# EAGLE board Down Linker IMver (EAGLE 9.6.2)
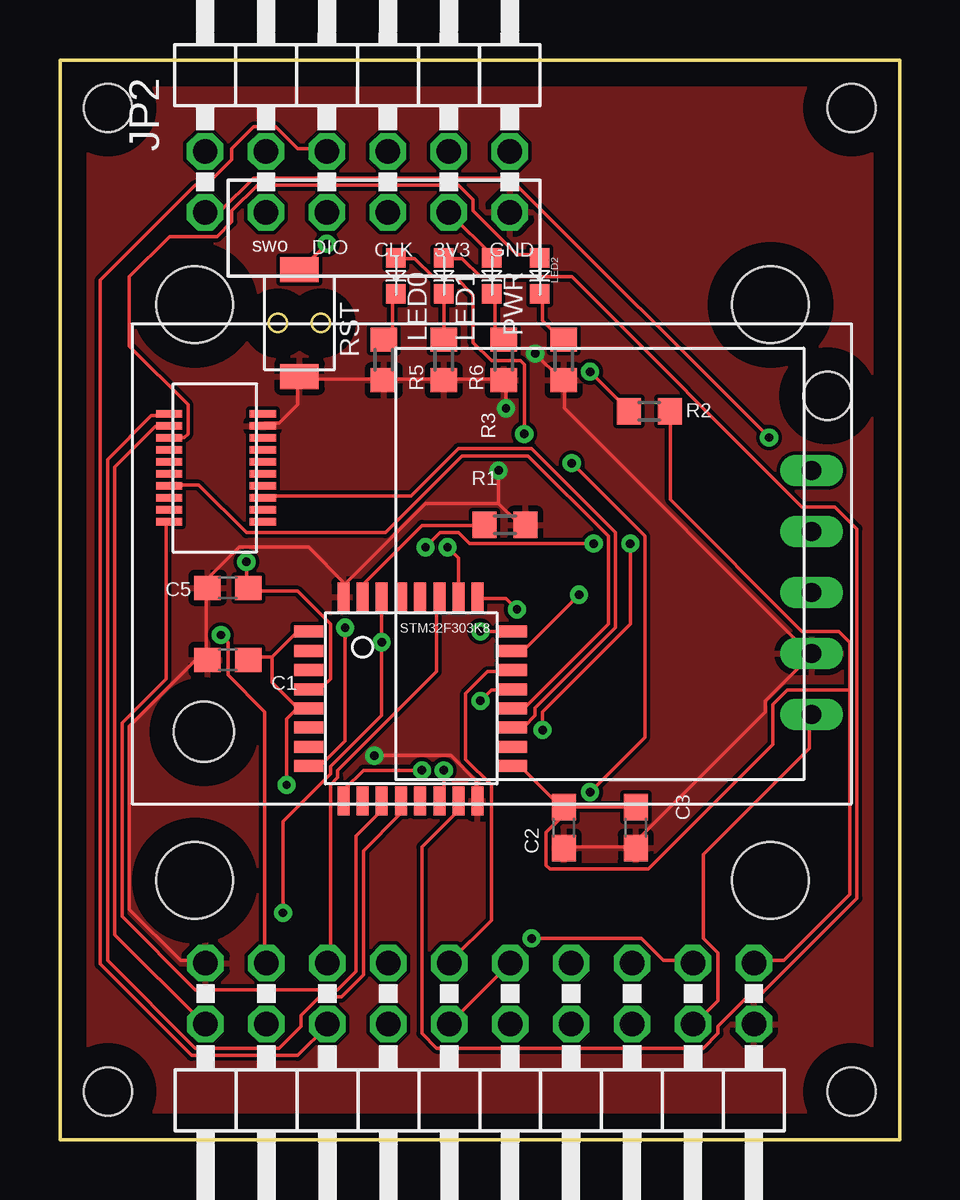
[diagram p0: board, top side]
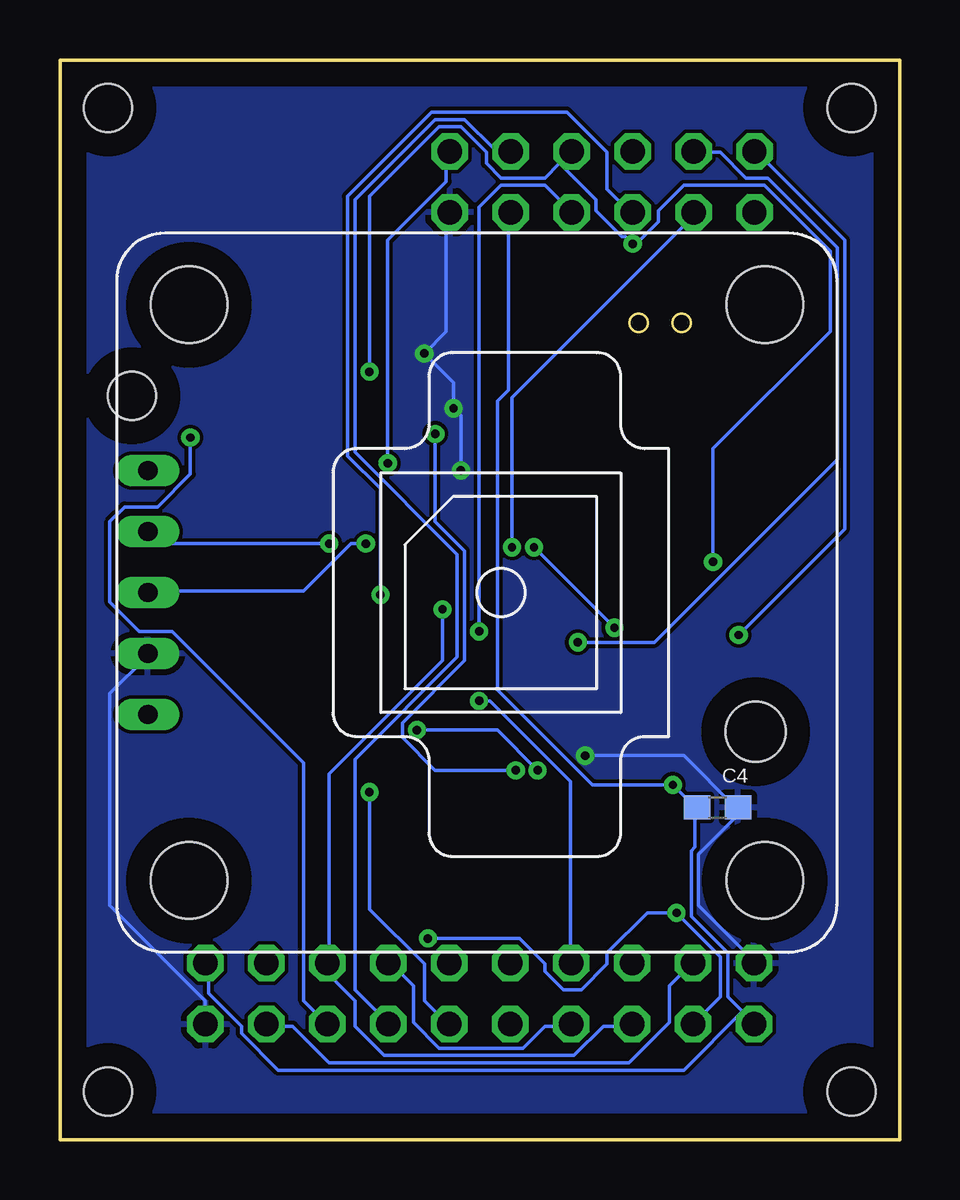
[diagram p1: board, bottom side, seen from below]

Size 35 x 45 mm. Coordinates in mm from the lower left corner, seen from the top.
Outline: 0,0 0,45 35,45 35,0 0,0
Copper layers (1*16): Top 0.035mm / dielectric 1.5mm / Bottom 0.035mm
Design rules "default": minimum track width 6mil, minimum drill 0.35mm, track to track 6mil, track to pad 6mil, pad to pad 6mil, via to via 6mil, smd to smd 6mil, copper to edge 40mil, drill to drill 6mil, minimum pad ring 10mil, minimum via ring 8mil, stop-mask expansion 4mil, vias tented up to drill 0mil, thermal gap 10mil
Holes 2 mm at 2,43 2,2 33,2 33,43

## Footprints (pad centres in the part's own frame; a part is rotated, then mirrored left to right if it is on the bottom)
C1608 = smd 1.1 x 1: 1 -0.85,0; 2 0.85,0
IM920C = smd 0.3 x 1.1: $P1 -1.75,-13.45; $P2 -1.75,-9.55; $P3 -2.25,-13.45; $P4 -2.25,-9.55; $P5 -2.75,-13.45; $P6 -2.75,-9.55; $P7 -3.25,-13.45; $P8 -3.25,-9.55; $P9 -3.75,-13.45; $P10 -3.75,-9.55; $P11 -4.25,-13.45; $P12 -4.25,-9.55; $P13 -4.75,-13.45; $P14 -4.75,-9.55; $P15 -5.25,-13.45; $P16 -5.25,-9.55; $P17 -5.75,-13.45; $P18 -5.75,-9.55; $P19 -6.25,-13.45; $P20 -6.25,-9.55 | hole 2.5: 7,-12 | hole 2: -7,14
2X06/90 = drill 1.016 octagon: 1 -6.35,-6.35; 2 -6.35,-3.81; 3 -3.81,-6.35; 4 -3.81,-3.81; 5 -1.27,-6.35; 6 -1.27,-3.81; 7 1.27,-6.35; 8 1.27,-3.81; 9 3.81,-6.35; 10 3.81,-3.81; 11 6.35,-6.35; 12 6.35,-3.81
2X10/90 = drill 1.016 octagon: 1 -11.43,-6.35; 2 -11.43,-3.81; 3 -8.89,-6.35; 4 -8.89,-3.81; 5 -6.35,-6.35; 6 -6.35,-3.81; 7 -3.81,-6.35; 8 -3.81,-3.81; 9 -1.27,-6.35; 10 -1.27,-3.81; 11 1.27,-6.35; 12 1.27,-3.81; 13 3.81,-6.35; 14 3.81,-3.81; 15 6.35,-6.35; 16 6.35,-3.81; 17 8.89,-6.35; 18 8.89,-3.81; 19 11.43,-6.35; 20 11.43,-3.81
OSXX1608C1A = smd 0.8 x 0.8: AN -0.75,0; CT 0.75,0
R0603 = smd 1 x 1.1: 1 -0.85,0; 2 0.85,0
TVAF06-A020B-R = smd 1.6 x 1.05: P$1 0,2.225; P$2 0,-2.225
STM32F303K8 = smd 0.5 x 1.2: BOOT 1.6,8.5; PA3/UART2_RX 0.8,0; PA4/SPI1_NSS 1.6,0; PA5/SPI1_SCK 2.4,0; PA6/SPI1_MISO 3.2,0; PA7/SPI1_MOSI 4,0; PA15/I2C1_SCL 6.4,8.5; PB0 4.8,0; PB1 5.6,0; PB3/SWO 5.6,8.5; PB4 4.8,8.5; PB5 4,8.5; PB6 3.2,8.5; PB7/I2C1_SDA 2.4,8.5; VSS 0.8,8.5; VSS2 6.4,0 | smd 1.2 x 0.5: NRST -0.65,4.65; PA0 -0.65,3.05; PA1 -0.65,2.25; PA2/UART2_TX -0.65,1.45; PA8 7.85,2.25; PA9/UART1_TX 7.85,3.05; PA10/UART1_RX 7.85,3.85; PA11/CAN_RX 7.85,4.65; PA12/CAN_TX 7.85,5.45; PA13/SWDIO 7.85,6.25; PA14/SWCLK 7.85,7.05; PF0 -0.65,6.25; PF1 -0.65,5.45; VDD -0.65,7.05; VDD2 7.85,1.45; VDDA -0.65,3.85
AE-GYSFDMAXB = drill 0.8 long: P1 13.716,5.08; P2 13.716,2.54; P3 13.716,0; P4 13.716,-2.54; P5 13.716,-5.08 | hole 3.2: -12,12; 12,12; 12,-12; -12,-12

## Placement (x,y rotation side)
C1  100nF  [C1608]  7,20 180 top
C2  100nF  [C1608]  21,13 270 top
C3  4.7uF  [C1608]  24,13 270 top
C4  10nF  [C1608]  7.59,13.83 0 bottom
C5  0.1uF  [C1608]  7,23 180 top
IM  IM920C  [IM920C]  18,24 270 top
JP2  [2X06/90]  12.4,45 0 top
JP3  [2X10/90]  17.5,1 180 top
LED0  [OSXX1608C1A]  14,36 270 top
LED1  [OSXX1608C1A]  16,36 270 top
LED2  [OSXX1608C1A]  20,36 270 top
PWR  [OSXX1608C1A]  18,36 270 top
R1  10k  [R0603]  18.56,25.62 0 top
R2  10k or DNF  [R0603]  24.57,30.36 0 top
R3  100  [R0603]  18.5,32.5 90 top
R4  100  [R0603]  21,32.5 90 top
R5  100  [R0603]  13.5,32.5 90 top
R6  100  [R0603]  16,32.5 90 top
RST  [TVAF06-A020B-R]  9.98,34.03 0 top
U$1  STM32F303K8  [STM32F303K8]  11.02,14.12 0 top
U$2  AE-GYSFDMAXB  [AE-GYSFDMAXB]  17.62,22.8 180 bottom

## Library data of the parts
C1-C5 = rcl; SPICEPREFIX: C
IM = IM920
JP2 JP3 = pinhead
LED0 LED1 LED2 PWR = Chip LED
R1-R6 = rcl; SPICEPREFIX: R
RST = Tact switch
U$1 = STM32F303K8
U$2 = AE-GYSFDMAXB

## Nets
+3V3: C1.1 C2.1 C3.1 C4.1 IM.$P17 JP2.9 JP3.1 JP3.20 PWR.AN R2.2 U$1.VDD U$1.VDD2 U$1.VDDA
+5V: JP2.2 JP3.4 JP3.17 U$2.P1
BIT1: JP3.11 U$1.PA12/CAN_TX
BIT2: JP3.13 U$1.PA11/CAN_RX
BOOT0: R1.1 U$1.BOOT
FP_CHECKER: JP3.15 U$1.PB4
FPRAW: JP2.12 JP3.10
GND: C1.2 C2.2 C3.2 C4.2 C5.2 IM.$P18 JP2.11 JP3.2 JP3.19 R1.2 R3.1 R4.1 R5.1 R6.1 RST.P$2 U$1.VSS U$1.VSS2 U$2.P2
GPSRX: U$1.PA2/UART2_TX U$2.P3
GPSTX: U$1.PA3/UART2_RX U$2.P4
IM_BUSY: IM.$P1 U$1.PA5/SPI1_SCK
IM_RESET: IM.$P19 U$1.PA6/SPI1_MISO
IM_RX: IM.$P6 U$1.PA9/UART1_TX
IM_TX: IM.$P7 U$1.PA10/UART1_RX
LED: IM.$P15 LED2.AN
LED0: LED0.AN U$1.PB0
LED1: LED1.AN U$1.PB1
LOGRX: JP3.7 JP3.14
LOGTX: JP3.9 JP3.12
N$1: PWR.CT R3.2
N$2: LED0.CT R5.2
N$3: LED2.CT R4.2
N$4: LED1.CT R6.2
NRST: C5.1 JP2.8 R2.1 RST.P$1 U$1.NRST
OSC_IN: U$1.PF0
OSC_OUT: U$1.PF1
PWM: JP2.1 JP3.6
SCL: JP2.6 JP3.5 JP3.16 U$1.PA15/I2C1_SCL
SDA: JP2.4 JP3.3 JP3.18 U$1.PB7/I2C1_SDA
SW: JP2.10 JP3.8
SWCLK: JP2.7 U$1.PA14/SWCLK
SWDIO: JP2.5 U$1.PA13/SWDIO
SWO: JP2.3 U$1.PB3/SWO

## Tracks (layer width: path | path; a pad name or v marks a point on that pad's centre or on a via)
+3V3  (via drill 0.35)
  Top 0.152: C2.1 21.03,13.87 23.93,13.87 C3.1 | U$1.VDD2 18.9,15.54 19.2,15.54 20.88,13.87 C2.1 | 32.92,18.75 32.92,10.21 30.18,7.47 28.96,7.47 JP3.1 | 32.92,18.75 32.92,20.73 32.46,21.18 30.94,21.18 25.45,26.67 25.45,30.33 R2.2 | 32.92,18.75 30.33,18.75 29.72,18.14 29.72,16.46 24.54,11.28 20.42,11.28 20.27,11.43 20.27,12.8 20.88,13.41 20.88,13.72 C2.1 | PWR.AN 17.98,36.88 16.31,38.56 JP2.9 | 8.84,20.12 7.92,20.12 C1.1 | 8.84,20.12 9.75,21.03 10.36,21.03 U$1.VDD | 9.91,17.98 10.36,17.98 U$1.VDDA 9.91,17.98 | 9.91,17.98 8.84,19.05 8.84,20.12 | IM.$P17 4.42,29.72 3.96,29.72 2.29,28.04 2.29,8.53 5.94,4.88 JP3.20 | 9.91,17.98 9.45,17.53 v9.45,14.78
  Bottom 0.152: 6.55,5.33 6.1,4.88 JP3.20 6.55,5.33 | 6.55,5.33 7.16,5.94 7.16,7.77 8.69,9.3 8.69,12.04 8.53,12.19 8.53,13.72 C4.1 8.53,13.87 v9.45,14.78 12.8,14.78 16.76,18.75 16.76,30.79 16.31,31.24 16.31,38.56 JP2.9 | 6.55,5.33 8.99,2.9 25.91,2.9 27.43,4.42 27.43,4.72 28.8,6.1 28.8,7.32 JP3.1
+5V  (via drill 0.35)
  Top 0.152: U$2.P1 31.24,17.68 31.24,16.31 26.82,11.89 26.82,8.38 27.43,7.77 27.43,5.79 26.52,4.88 JP3.4 | v6.71,21.03 7.01,20.73 7.01,19.36 8.53,17.83 8.53,7.47 JP3.17
  Bottom 0.152: v6.71,21.03 2.29,25.45 2.29,37.49 5.94,41.15 JP2.2 | JP3.4 26.36,4.72 25.3,4.72 23.77,3.2 11.28,3.2 9.6,4.88 9.6,6.4 8.69,7.32 JP3.17
BIT1
  Top 0.152: U$1.PA12/CAN_TX 18.75,19.51 17.83,19.51 16.92,18.59 16.92,15.85 17.98,14.78 17.98,9.14 16.31,7.47 JP3.11
BIT2  (via drill 0.35)
  Top 0.152: v17.53,18.29 17.98,18.75 18.75,18.75 U$1.PA11/CAN_RX
  Bottom 0.152: v17.53,18.29 17.07,18.29 13.72,14.94 13.72,7.47 JP3.13
BOOT0
  Top 0.152: R1.1 17.68,25.6 15.09,25.6 12.65,23.16 12.65,22.71 U$1.BOOT
FP_CHECKER
  Top 0.152: U$1.PB4 15.7,22.55 15.7,19.51 11.58,15.39 11.58,15.09 11.28,14.78 11.28,7.47 JP3.15
FPRAW  (via drill 0.35)
  Top 0.152: v21.34,28.19 24.38,25.15 24.38,16.76 v22.1,14.48
  Bottom 0.152: v21.34,28.19 21.34,37.49 18.9,39.93 18.9,41.15 JP2.12 | v22.1,14.48 22.1,9.6 19.81,7.32 19.81,5.79 18.9,4.88 JP3.10
GND  (via drill 0.35)
  Top 0.152: 18.29,26.52 19.05,25.76 19.36,25.76 R1.2 | 18.29,26.52 15.24,26.52 11.89,23.16 | 11.89,23.16 11.89,22.71 U$1.VSS 11.89,23.16 | 11.89,23.16 10.36,24.69 7.47,24.69 6.25,23.47 6.25,23.01 C5.2 6.1,22.86 6.1,20.12 C1.2 6.1,19.96 5.64,19.96 2.9,17.22 2.9,9.6 5.03,7.47 5.94,7.47 JP3.19 | v13.11,16 16.31,16 17.37,14.94 17.37,14.17 U$1.VSS2 | IM.$P18 8.53,29.87 9.14,29.87 9.91,30.63 9.91,31.7 RST.P$2 10.06,31.7 13.41,31.7 R5.1 13.56,31.7 15.85,31.7 R6.1 16,31.7 18.44,31.7 R3.1 18.59,31.55 v18.59,30.48 | C2.2 21.03,12.19 23.93,12.19 C3.2 24.08,12.19 24.08,12.5 29.41,17.83 29.41,18.29 31.24,20.12 U$2.P2 31.24,20.27 21.03,30.48 21.03,31.55 R4.1 20.88,31.7 v19.81,32.77 | v18.29,27.89 18.29,26.52
  Bottom 0.152: JP3.19 6.1,7.47 8.38,9.75 8.38,11.89 6.86,13.41 6.86,13.72 C4.2 6.86,13.87 8.99,16 v13.11,16 | JP2.11 18.9,38.56 18.9,33.68 v19.81,32.77 18.59,31.55 v18.59,30.48 18.29,30.18 v18.29,27.89 | JP3.2 28.96,4.88 28.96,5.79 32.92,9.75 32.92,18.59 31.39,20.12 U$2.P2
  pour Top: -3,48 38,48 38,-4 -3,-4
  pour Bottom: -6,49 39,49 39,-5 -6,-5
GPSRX  (via drill 0.35)
  Top 0.152: v11.89,21.34 11.89,16.61 10.97,15.7 10.52,15.7 U$1.PA2/UART2_TX | v15.24,24.69 15.85,25.3 16.61,25.3 17.07,24.84 v22.25,24.84
  Bottom 0.152: v15.24,24.69 v11.89,21.34 | v22.25,24.84 22.86,24.84 24.84,22.86 31.24,22.86 U$2.P3
GPSTX  (via drill 0.35)
  Top 0.152: v15.09,15.39 12.65,15.39 11.89,14.63 11.89,14.17 U$1.PA3/UART2_RX | v20.12,17.07 20.12,17.83 23.77,21.49 v23.77,24.84
  Bottom 0.152: v15.09,15.39 16.76,17.07 v20.12,17.07 | v23.77,24.84 30.79,24.84 31.24,25.3 U$2.P4
IM_BUSY
  Top 0.152: IM.$P1 4.42,25.6 4.42,19.2 2.59,17.37 2.59,9.3 5.64,6.25 11.58,6.25 12.34,7.01 12.34,12.65 13.41,13.72 13.41,14.02 U$1.PA5/SPI1_SCK
IM_RESET
  Top 0.152: IM.$P19 4.42,30.18 3.81,30.18 1.98,28.35 1.98,7.47 5.64,3.81 9.14,3.81 10.06,4.72 10.06,5.18 10.82,5.94 11.73,5.94 12.65,6.86 12.65,12.04 14.17,13.56 14.17,14.02 U$1.PA6/SPI1_MISO
IM_RX
  Top 0.152: IM.$P6 8.53,26.82 14.63,26.82 16.61,28.8 19.66,28.8 23.16,25.3 23.16,21.34 19.81,17.98 19.81,17.68 19.36,17.22 18.9,17.22 U$1.PA9/UART1_TX
IM_TX
  Top 0.152: IM.$P7 4.57,27.28 5.79,27.28 7.77,25.3 13.56,25.3 16.76,28.5 19.51,28.5 22.86,25.15 22.86,21.49 19.36,17.98 18.9,17.98 U$1.PA10/UART1_RX
LED
  Top 0.152: LED2.AN 19.96,36.88 19.05,36.88 17.22,38.71 17.22,39.17 16.61,39.78 8.23,39.78 7.16,38.71 7.16,38.25 6.55,37.64 4.57,37.64 2.9,35.97 2.9,33.07 5.33,30.63 5.33,29.41 5.18,29.26 4.57,29.26 IM.$P15
LED0  (via drill 0.35)
  Top 0.152: v19.36,29.41 19.36,32.31 19.2,32.46 17.98,32.46 17.22,33.22 17.22,35.2 16.46,35.97 15.54,35.97 14.78,36.73 14.02,36.73 LED0.AN | v16,15.39 16,14.33 15.85,14.17 U$1.PB0
  Bottom 0.152: v19.36,29.41 19.36,25.76 18.14,24.54 18.14,19.96 20.73,17.37 20.73,16.76 19.36,15.39 v16,15.39
LED1
  Top 0.152: LED1.AN 16,36.73 16.76,36.73 17.53,35.97 21.34,35.97 30.94,26.36 32.31,26.36 33.22,25.45 33.22,10.06 29.11,5.94 28.65,5.94 27.43,4.72 27.43,4.42 26.82,3.81 15.7,3.81 15.09,4.42 15.09,12.19 16.61,13.72 16.61,14.02 U$1.PB1
LOGRX
  Bottom 0.152: JP3.14 13.72,4.72 14.78,4.72 15.7,3.81 19.2,3.81 20.27,4.88 20.27,6.4 21.18,7.32 JP3.7
LOGTX
  Top 0.152: JP3.12 16.31,4.88 18.75,7.32 JP3.9
N$1
  Top 0.152: PWR.CT 18.14,35.2 18.14,33.68 18.44,33.38 R3.2
N$2
  Top 0.152: LED0.CT 13.87,35.2 13.87,33.68 13.56,33.38 R5.2
N$3
  Top 0.152: LED2.CT 20.12,35.2 20.12,34.14 20.88,33.38 R4.2
N$4
  Top 0.152: LED1.CT 16,35.2 16,33.38 R6.2
NRST  (via drill 0.35)
  Top 0.152: U$1.NRST 10.52,18.9 10.97,18.9 11.28,19.2 11.28,21.49 9.91,22.86 7.92,22.86 C5.1 7.77,23.01 v7.77,24.08 | v22.1,32 23.62,30.48 R2.1 | v11.12,37.34 10.06,36.27 RST.P$1
  Bottom 0.152: v22.1,32 22.1,39.32 19.2,42.22 18.29,42.22 17.22,41.15 17.22,40.69 16.61,40.08 14.78,40.08 14.17,40.69 | 14.17,40.69 13.72,41.15 JP2.8 14.17,40.69 | 14.17,40.69 12.65,39.17 12.65,38.71 11.58,37.64 11.43,37.64 v11.12,37.34 10.97,37.34 10.06,38.25 10.06,38.71 8.99,39.78 5.64,39.78 2.9,37.03 2.9,33.68 7.77,28.8 v7.77,24.08
PWM  (via drill 0.35)
  Top 0.152: v29.57,29.26 18.75,40.08 8.08,40.08 6.71,38.71 6.1,38.71 JP2.1
  Bottom 0.152: v29.57,29.26 29.57,27.74 30.94,26.36 32.31,26.36 32.92,25.76 32.92,22.4 31.7,21.18 30.33,21.18 24.84,15.7 24.84,5.79 23.93,4.88 JP3.6
SCL  (via drill 0.35)
  Top 0.152: v19.05,22.1 18.59,22.55 17.53,22.55 U$1.PA15/I2C1_SCL | JP2.6 11.12,41.3 9.91,41.3 8.99,42.22 8.08,42.22 7.16,41.3 7.16,40.84 6.1,39.78 5.64,39.78 1.68,35.81 1.68,7.32 5.49,3.5 9.91,3.5 11.12,4.72 JP3.16
  Bottom 0.152: v19.05,22.1 19.05,19.96 23.77,15.24 23.77,7.47 JP3.5 23.77,7.32 23.77,6.86 22.71,5.79 22.71,4.72 21.49,3.5 13.56,3.5 12.34,4.72 11.28,4.72 JP3.16
SDA  (via drill 0.35)
  Top 0.152: v9.3,9.45 9.3,13.26 11.28,15.24 11.28,15.54 13.41,17.68 v13.41,20.73 13.41,22.55 U$1.PB7/I2C1_SDA | v19.66,8.38 24.23,8.38 25.15,7.47 26.36,7.47 JP3.3
  Bottom 0.152: JP3.18 8.53,4.88 7.47,5.94 7.47,7.62 v9.3,9.45 10.52,9.45 12.19,7.77 12.19,7.32 13.26,6.25 14.02,6.25 14.78,7.01 14.78,7.32 15.85,8.38 v19.66,8.38 | v13.41,20.73 10.21,20.73 2.59,28.35 2.59,37.19 5.49,40.08 6.4,40.08 7.47,41.15 8.53,41.15 JP2.4
SW
  Bottom 0.152: JP2.10 16.31,41.3 16.92,41.3 18.14,42.52 19.36,42.52 22.71,39.17 22.71,28.65 18.44,24.38 18.44,20.12 22.71,15.85 22.71,6.25 21.34,4.88 JP3.8
SWCLK  (via drill 0.35)
  Top 0.152: v17.53,21.18 18.75,21.18 U$1.PA14/SWCLK
  Bottom 0.152: v17.53,21.18 17.53,38.86 16.61,39.78 14.78,39.78 13.72,38.71 JP2.7
SWDIO  (via drill 0.35)
  Top 0.152: v21.64,22.71 19.36,20.42 18.9,20.42 U$1.PA13/SWDIO
  Bottom 0.152: v21.64,22.71 21.64,27.13 23.01,28.5 23.01,39.32 19.51,42.82 13.87,42.82 12.19,41.15 12.19,39.62 11.28,38.71 JP2.5
SWO  (via drill 0.35)
  Top 0.152: v16.15,24.69 16.61,24.23 16.61,22.71 U$1.PB3/SWO
  Bottom 0.152: v16.15,24.69 16.15,30.94 8.53,38.56 JP2.3

## Text on the board
tPlace: swo | DIO | CLK | 3V3 | GND